# Altium PCB PCB-verbesserung_2025-06-02.pcbdoc
Units mil, origin at the board's own origin, x right, y up, seen from the top; angles counter-clockwise.
Board outline 3519.31 x 3372.2 mil, 2 copper layers (Top Layer, Bottom Layer); 8 components, 26 nets, 80 pads, 0 vias.
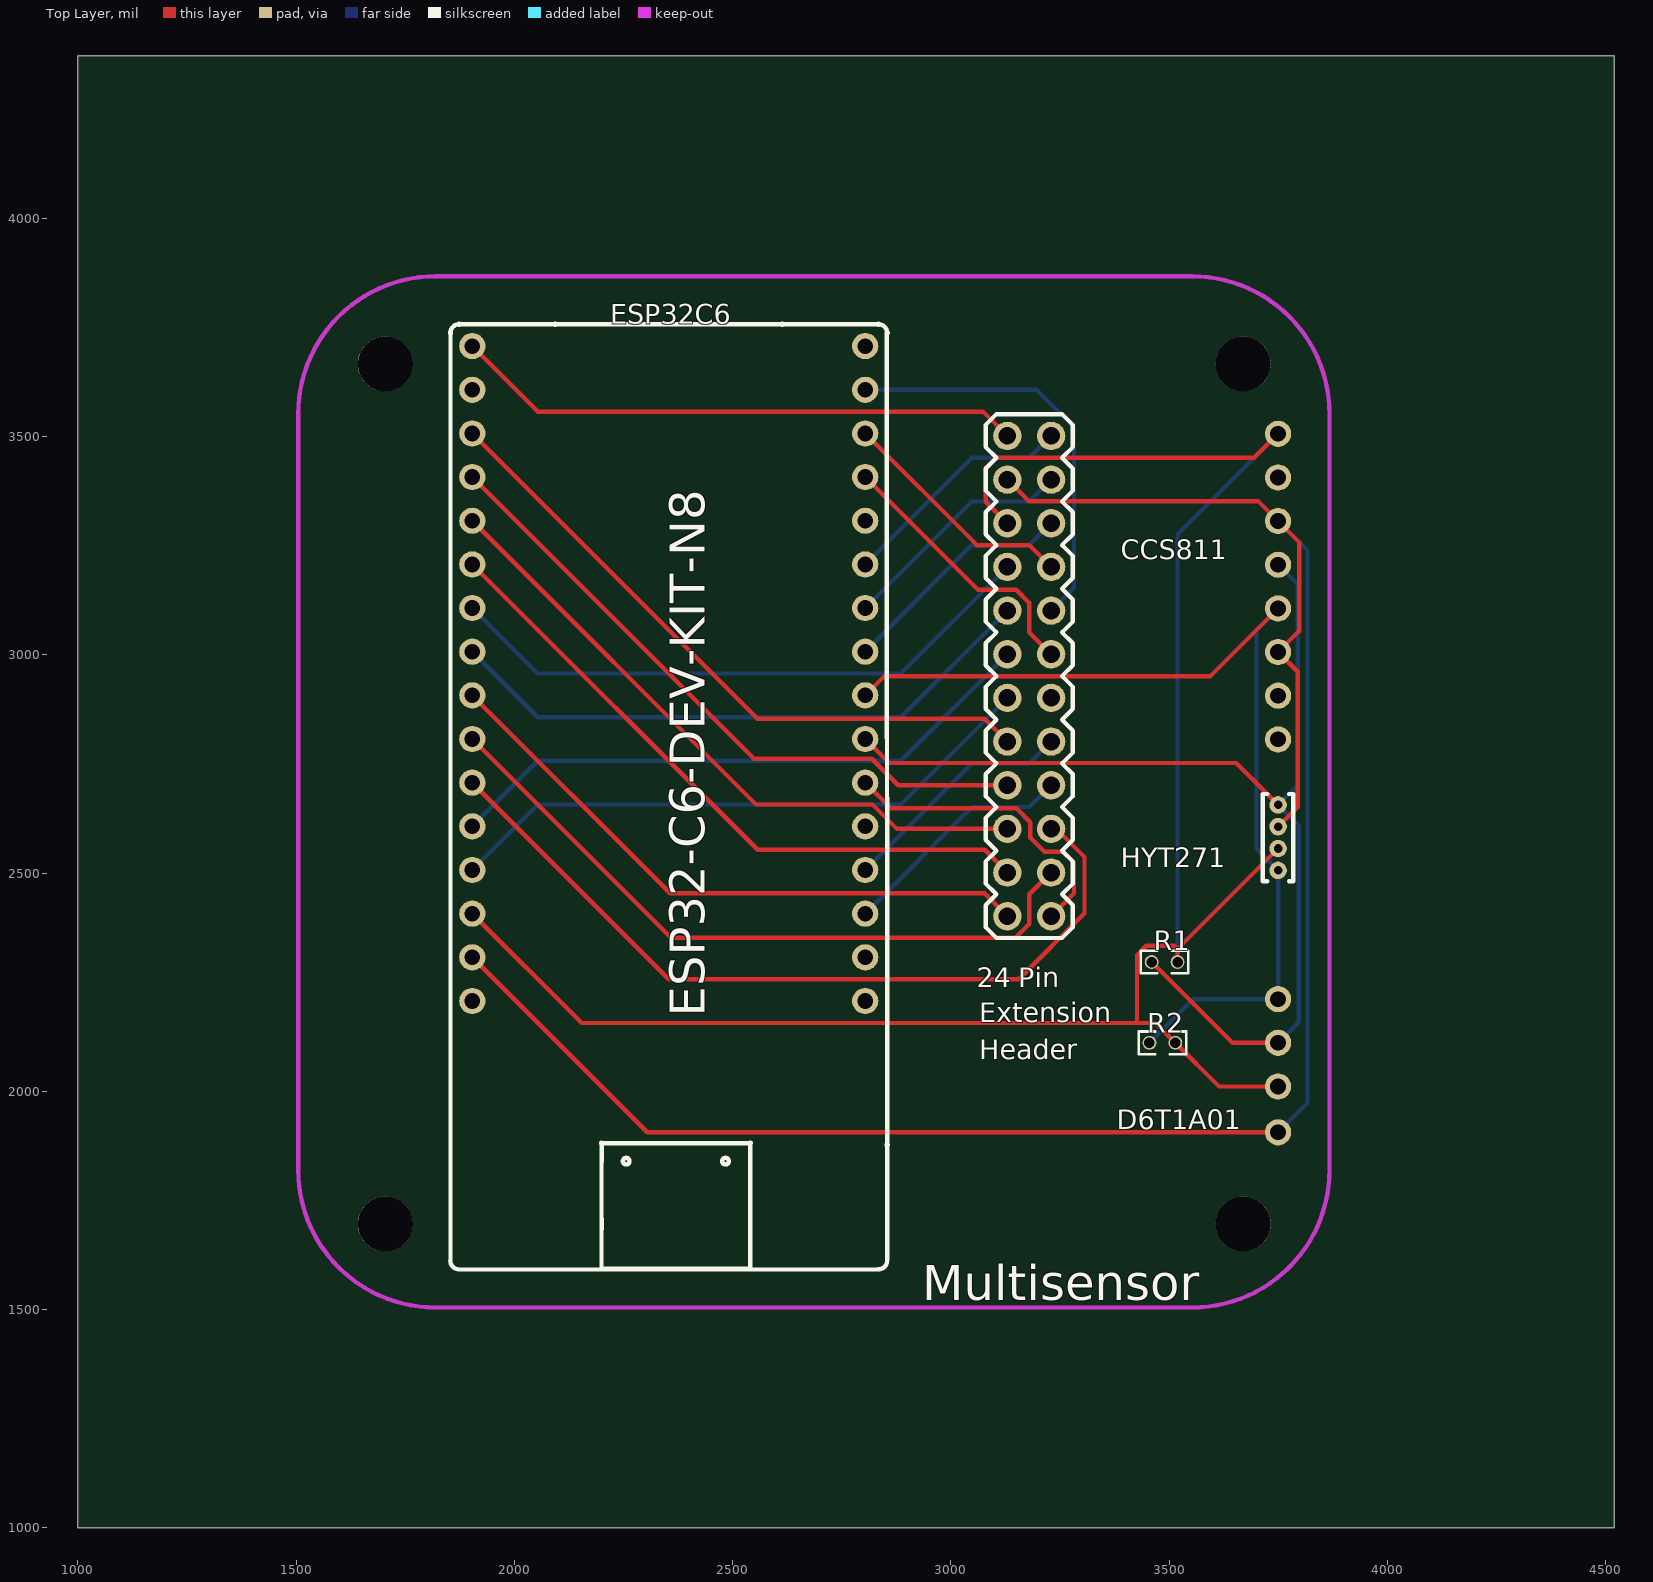
[diagram p0: Top Layer view]
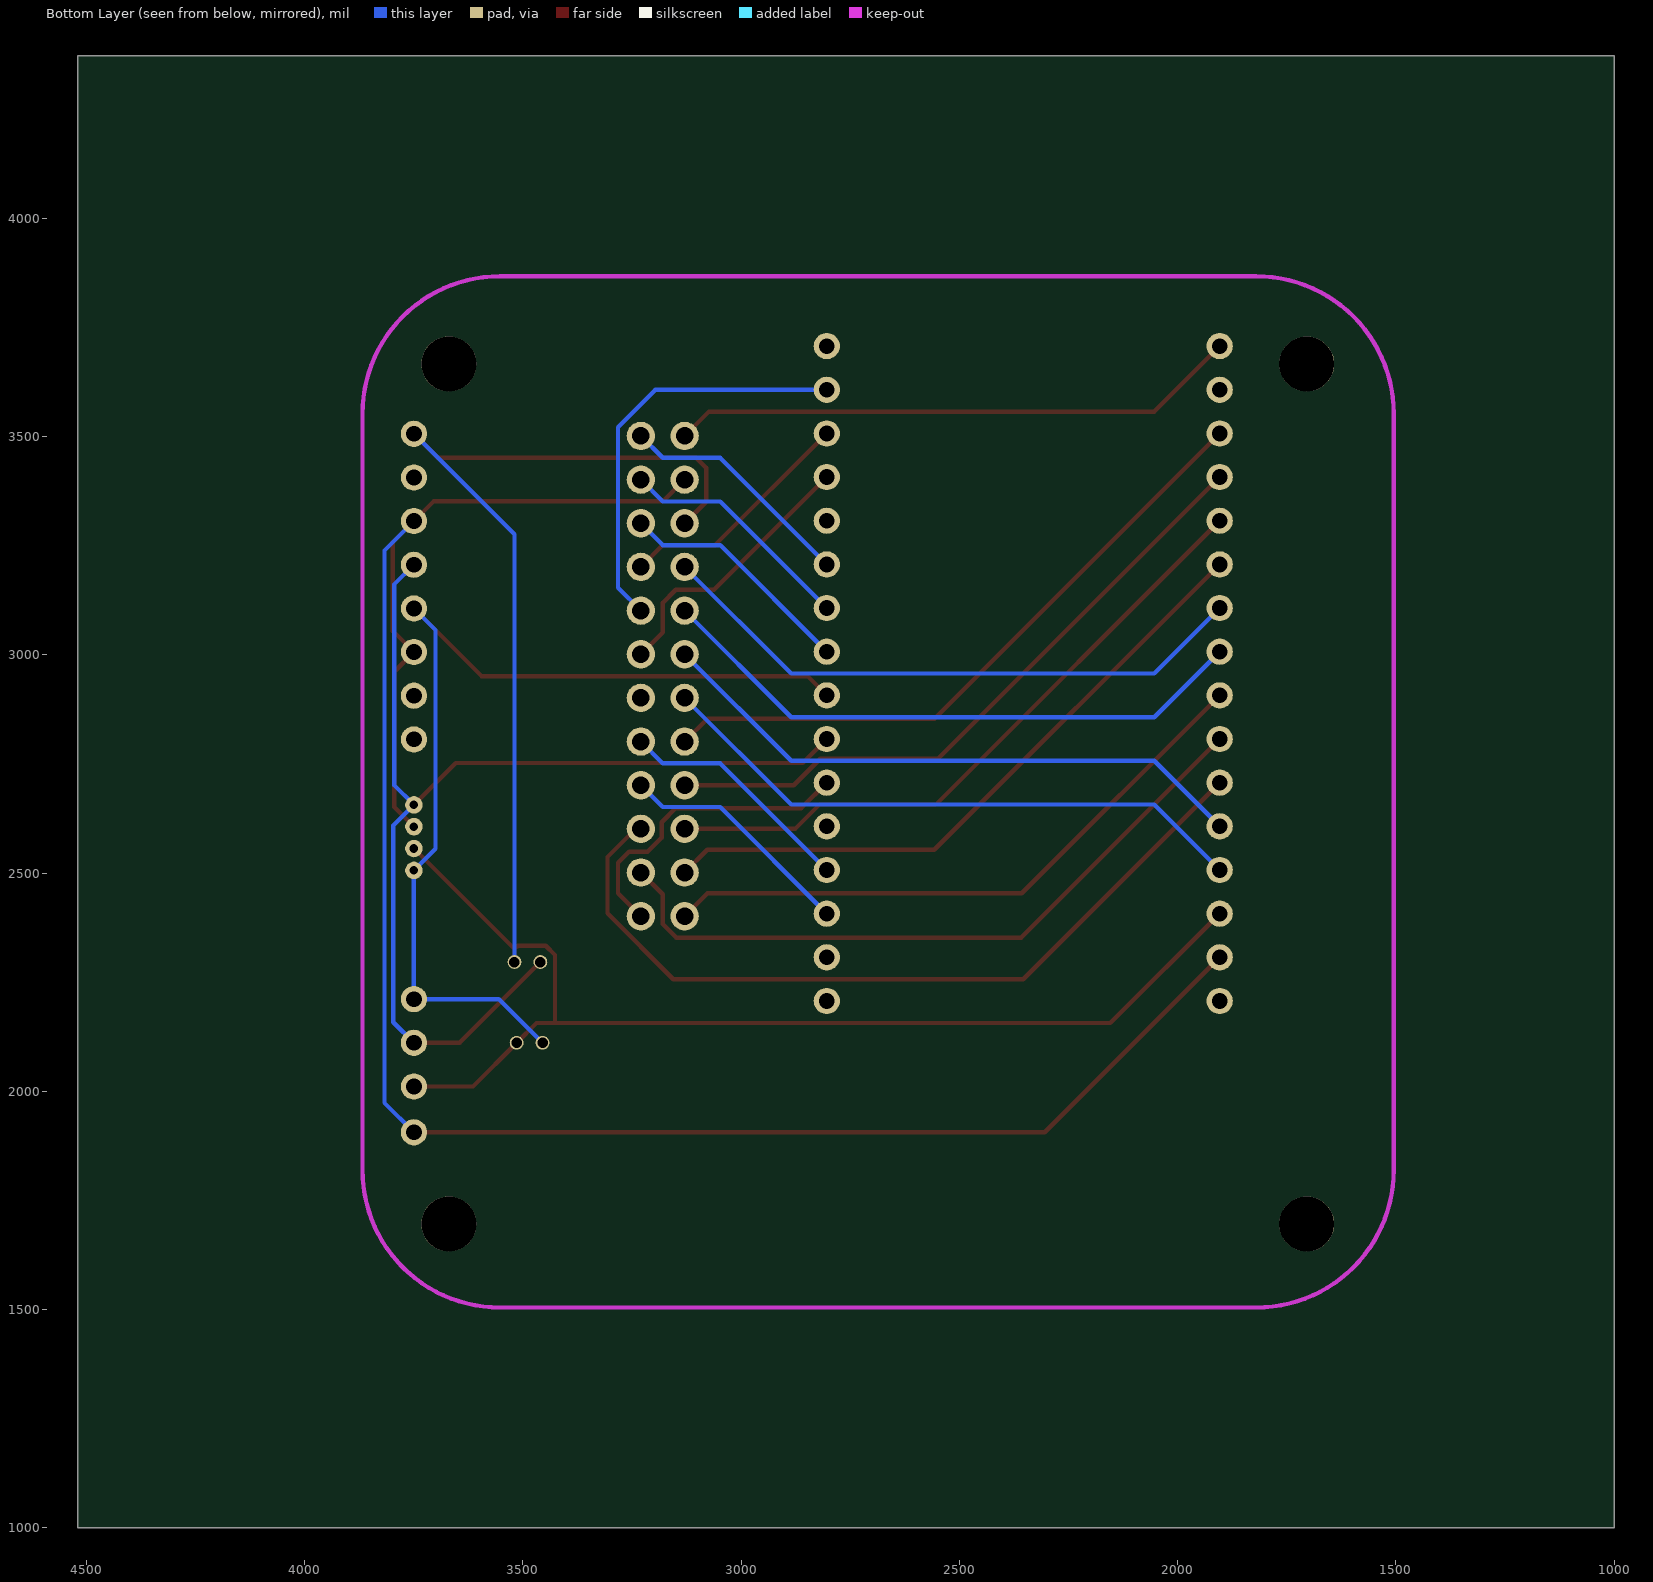
[diagram p1: Bottom Layer view, seen from below]

## Layer stack, top to bottom
Top Layer: signal copper (thickness not stored)
Dielectric: dielectric 12.6, FR-4, Dk 4.8
Bottom Layer: signal copper (thickness not stored)

## Board outline
4519.31,1000 1000,1000 1000,4372.2 4519.31,4372.2

## Components (designator, comment, footprint, x,y, rotation, side; value= is the part's Value field where it differs from the comment)
24 "2X12 PIN HEADER MALE" "PIN-HEADER-210S-2X12P WK" 3229.41,3351.38 r270 top
CCS811 "CCS811 Joy-It" "CCS811 JOY-IT" 3749.41,3506.38 r0 top
D6T1A01 "D6T1A01" D6T1A01 3749.41,2211.38 r0 top
ESP32C6 "ESP32-C6-DEV-KIT" ESP32-C6-DEV-KIT-N8 1899.45,3706.33 r0 top
HYT271 "HYT271" HYT271 3749.41,2656.38 r270 top
R1 "4,7k" R0603 3489.41,2296.38 r0 top
R2 "4,7k" R0603 3484.41,2111.38 r0 top
? "" ? 3883.36,2581.38 r0 top

## Footprints (in the part's own frame and the unit in brackets; to place one, negate y for a bottom-side part, rotate by r counter-clockwise, add the part's x,y. Pads: shape width x height; smd on the part's side, far side on the other; paste and mask are expansions set on the pad)
"CCS811 JOY-IT" [mil]
  round 60 hole 36 paste+0 mask+2: 1(0,0) 2(0,-100) 3(0,-200) 4(0,-300) 5(0,-400) 6(0,-500) 7(0,-600) 8(0,-700)
D6T1A01 [mil]
  round 60 hole 36 paste+0 mask+2: 1(0,0) 2(0,-100) 3(0,-200) 4(0,-305)
ESP32-C6-DEV-KIT-N8 [mil]
  round 60 hole 36 paste+0 mask+2: 1(4.26,0.85) 2(4.26,-99.15) 3(4.26,-199.15) 4(4.26,-299.15) 5(4.26,-399.15) 6(4.26,-499.15) 7(4.26,-599.15) 8(4.26,-699.15) 9(4.26,-799.15) 10(4.26,-899.15) 11(4.26,-999.15) 12(4.26,-1099.15) 13(4.26,-1199.15) 14(4.26,-1299.15) 15(4.26,-1399.15) 16(4.26,-1499.15) 17(904.26,-1499.15) 18(904.26,-1399.15) 19(904.26,-1299.15) 20(904.26,-1199.15) 21(904.26,-1099.15) 22(904.26,-999.15) 23(904.26,-899.15) 24(904.26,-799.15) 25(904.26,-699.15) 26(904.26,-599.15) 27(904.26,-499.15) 28(904.26,-399.15) 29(904.26,-299.15) 30(904.26,-199.15) 31(904.26,-99.15) 32(904.26,0.85)
  silkscreen extent -47,-2114 956,52
HYT271 [mil]
  silkscreen extent -25,-35 175,35
"PIN-HEADER-210S-2X12P WK" [mil]
  round 65 hole 40 paste+0 mask+4: 1(-150,0) 2(-50,0) 3(50,0) 4(150,0) 5(250,0) 6(350,0) 7(450,0) 8(550,0) 9(650,0) 10(750,0) 11(850,0) 12(950,0) 13(-150,-100) 14(-50,-100) 15(50,-100) 16(150,-100) 17(250,-100) 18(350,-100) 19(450,-100) 20(550,-100) 21(650,-100) 22(750,-100) 23(850,-100) 24(950,-100)
  silkscreen extent -200,-150 1000,50
R0603 [mm]
  round 0.806 hole 0.61 paste-100 mask+0.051: 1(-0.753,0) 2(0.753,0)
  silkscreen extent -1.39,-0.66 1.39,0.66
? [mil]

## Free pads (board coordinates)
  round 40 hole 19.84 paste+0 mask+2: 1(3749.41,2656.38) 2(3749.41,2606.38) 3(3749.41,2556.38) 4(3749.41,2506.38)
  round 125.98 hole 125.98 unplated paste+0: ""(1704.41,1696.38) ""(1704.41,3666.38) ""(3669.41,1696.38) ""(3669.41,3666.38)

## Nets (pads, with @x,y where several pads share a name; then routed paths per layer and width w, separated by ;. In a path a pad name is that pad's centre, name@x,y a point inside that pad or via, vN(x,y) a via of type N, cw(c..) or ccw(c..) an arc to the next point about the centre after c; other vN are vias at no path point)
3V3: 24.13 ESP32C6.1 | length 1310.9
  Top Layer w10: ESP32C6.1 2053.66,3557.23 3073.56,3557.23 24.13
5V0: 24.15 CCS811.1 D6T1A01.3 ESP32C6.14 pad.3 R1.2 R2.2 | length 4780.3
  Top Layer w10: ESP32C6.14 2154.16,2156.73 3426.31,2156.73 ; 24.15 3079.94,3350.85 3079.94,3428.18 3103.22,3451.46 3694.49,3451.46 CCS811.1 ; R1.2 3519.07,2326.04 ; D6T1A01.3 3614.07,2011.38 R2.2 3468.72,2156.73 3426.31,2156.73 ; pad.3 3519.07,2326.04 ; 3426.31,2156.73 3426.31,2312.62 3447.54,2333.85 3511.26,2333.85 3519.07,2326.04
  Bottom Layer w10: R1.2 3519.07,3276.04 CCS811.1
GND: 24.14 CCS811.3 CCS811.6 D6T1A01.4 ESP32C6.15 pad.2 | length 4904.1
  Top Layer w10: ESP32C6.15 2304.51,1906.38 D6T1A01.4 ; 24.14 3179.35,3351.44 3704.35,3351.44 CCS811.3 3797.46,3258.33 3797.46,3054.43 CCS811.6 3794.49,2961.3 3794.49,2651.46 pad.2
  Bottom Layer w10: D6T1A01.4 3816.81,1973.78 3816.81,3238.98 CCS811.3
GPIO0: 24.16 ESP32C6.7 | length 1389
  Bottom Layer w10: ESP32C6.7 2053.71,2957.18 2885.21,2957.18 24.16
GPIO1: 24.17 ESP32C6.8 | length 1389
  Bottom Layer w10: ESP32C6.8 2053.71,2857.18 2885.21,2857.18 24.17
GPIO2: 24.18 ESP32C6.12 | length 1389
  Bottom Layer w10: ESP32C6.12 2053.71,2757.18 2885.21,2757.18 24.18
GPIO3: 24.19 ESP32C6.13 | length 1389
  Bottom Layer w10: ESP32C6.13 2053.71,2657.18 2885.21,2657.18 24.19
GPIO4: 24.20 ESP32C6.3 | length 1518.1
  Top Layer w10: ESP32C6.3 2557.09,2853.8 3076.99,2853.8 24.20
GPIO5: 24.21 ESP32C6.4 | length 1518.1
  Top Layer w10: ESP32C6.4 2548.79,2762.1 2818.87,2762.1 2879.59,2701.38 24.21
GPIO6: 24.22 ESP32C6.5 | length 1518.1
  Top Layer w10: ESP32C6.5 2553.71,2657.18 2820.49,2657.18 2876.29,2601.38 24.22
GPIO7: 24.23 ESP32C6.6 | length 1518.1
  Top Layer w10: ESP32C6.6 2557.46,2553.43 3077.36,2553.43 24.23
GPIO8: 24.24 ESP32C6.9 | length 1435.2
  Top Layer w10: ESP32C6.9 2357.09,2453.8 3076.99,2453.8 24.24
GPIO9: 24.12 ESP32C6.22 | length 718.6
  Top Layer w10: ESP32C6.22 2861.93,2648.96 3149.4,2648.96 3181.83,2616.53 3181.83,2581.39 3214.23,2548.99 3256.45,2548.99 3281.77,2523.67 3281.77,2453.74 24.12
GPIO10: 24.11 ESP32C6.10 | length 1615.7
  Top Layer w10: ESP32C6.10 2358.63,2352.26 3148.18,2352.26 3179.41,2383.49 3179.41,2451.38 24.11
GPIO11: 24.10 ESP32C6.11 | length 1883.4
  Top Layer w10: ESP32C6.11 2353.71,2257.18 3155.22,2257.18 3305.98,2407.94 3305.98,2537.03 3241.63,2601.38 24.10
GPIO12: 24.9 ESP32C6.19 | length 547.6
  Bottom Layer w10: ESP32C6.19 3047.91,2651.38 3179.41,2651.38 24.9
GPIO13: 24.8 ESP32C6.20 | length 547.6
  Bottom Layer w10: ESP32C6.20 3047.91,2751.38 3179.41,2751.38 24.8
GPIO14: 24.7
GPIO15: 24.6 ESP32C6.29 | length 633.4
  Top Layer w10: ESP32C6.29 3061.93,3148.96 3149.4,3148.96 3179.41,3118.95 3179.41,3051.38 24.6
GPIO16: 24.5 ESP32C6.31 | length 955.5
  Bottom Layer w10: ESP32C6.31 3196.17,3607.18 3281.83,3521.52 3281.83,3153.8 24.5
GPIO17: 24.4 ESP32C6.30 | length 552.4
  Top Layer w10: ESP32C6.30 3059.51,3251.38 3179.41,3251.38 24.4
GPIO20: 24.3 ESP32C6.25 | length 547.6
  Bottom Layer w10: ESP32C6.25 3047.91,3251.38 3179.41,3251.38 24.3
GPIO21: 24.2 ESP32C6.26 | length 547.6
  Bottom Layer w10: ESP32C6.26 3047.91,3351.38 3179.41,3351.38 24.2
GPIO22: 24.1 ESP32C6.27 | length 547.6
  Bottom Layer w10: ESP32C6.27 3047.97,3451.44 3179.47,3451.44 24.1
SCL: CCS811.5 D6T1A01.1 ESP32C6.24 pad.4 R2.1 | length 2300.3
  Top Layer w10: ESP32C6.24 2847.91,2951.38 3594.41,2951.38 CCS811.5
  Bottom Layer w10: R2.1@3454.75,2111.38 3554.75,2211.38 D6T1A01.1 pad.4 3699.9,2555.89 3699.9,3056.87 CCS811.5
SDA: CCS811.4 D6T1A01.2 ESP32C6.23 pad.1 R1.1 | length 2546.2
  Top Layer w10: ESP32C6.23 2858.63,2752.26 3653.53,2752.26 pad.1 ; R1.1@3459.75,2296.38 3644.75,2111.38 D6T1A01.2
  Bottom Layer w10: D6T1A01.2 3796.73,2158.7 3796.73,2609.06 pad.1 3794.69,2701.66 3794.69,3161.1 CCS811.4
pads on no net: CCS811.2 CCS811.7 CCS811.8 ESP32C6.2 ESP32C6.16 ESP32C6.17 ESP32C6.18 ESP32C6.21 ESP32C6.28 ESP32C6.32

## Keep-outs
Keep-Out Layer:
  lines w10: 1505,1819.96 ccw(c1819.96,1819.96) 1819.96,1505 ; 1505,3552.24 cw(c1819.96,3552.24) 1819.96,3867.2 ; 3552.24,1505 ccw(c3552.24,1819.96) 3867.2,1819.96 ; 3552.24,3867.2 cw(c3552.24,3552.24) 3867.2,3552.24

## Silkscreen, mask and mechanical layers (free items; w line width, h text height)
Top Overlay:
  text "Pin" at 3154.41,2238.88 h45
  text "Extension" at 3064.41,2158.88 h45
  text "Header" at 3064.41,2073.88 h45
  text "Multisensor" at 2934.41,1521.38 h80

## Text inside footprints (layer, text, board x,y; h text height)
ESP32C6: Top Overlay "ESP32-C6-DEV-KIT-N8" at 2436.57,2171.47 h80 r90